# Altium PCB ControlBoard.PcbDoc
Units mil, origin at the board's own origin, x right, y up, seen from the top; angles counter-clockwise.
Board outline 1195.03 x 1520.03 mil, 4 copper layers (Top Layer, POWER, GND, Bottom Layer), stack 23.756 mil thick; 25 components, 17 nets, 58 pads, 17 vias.
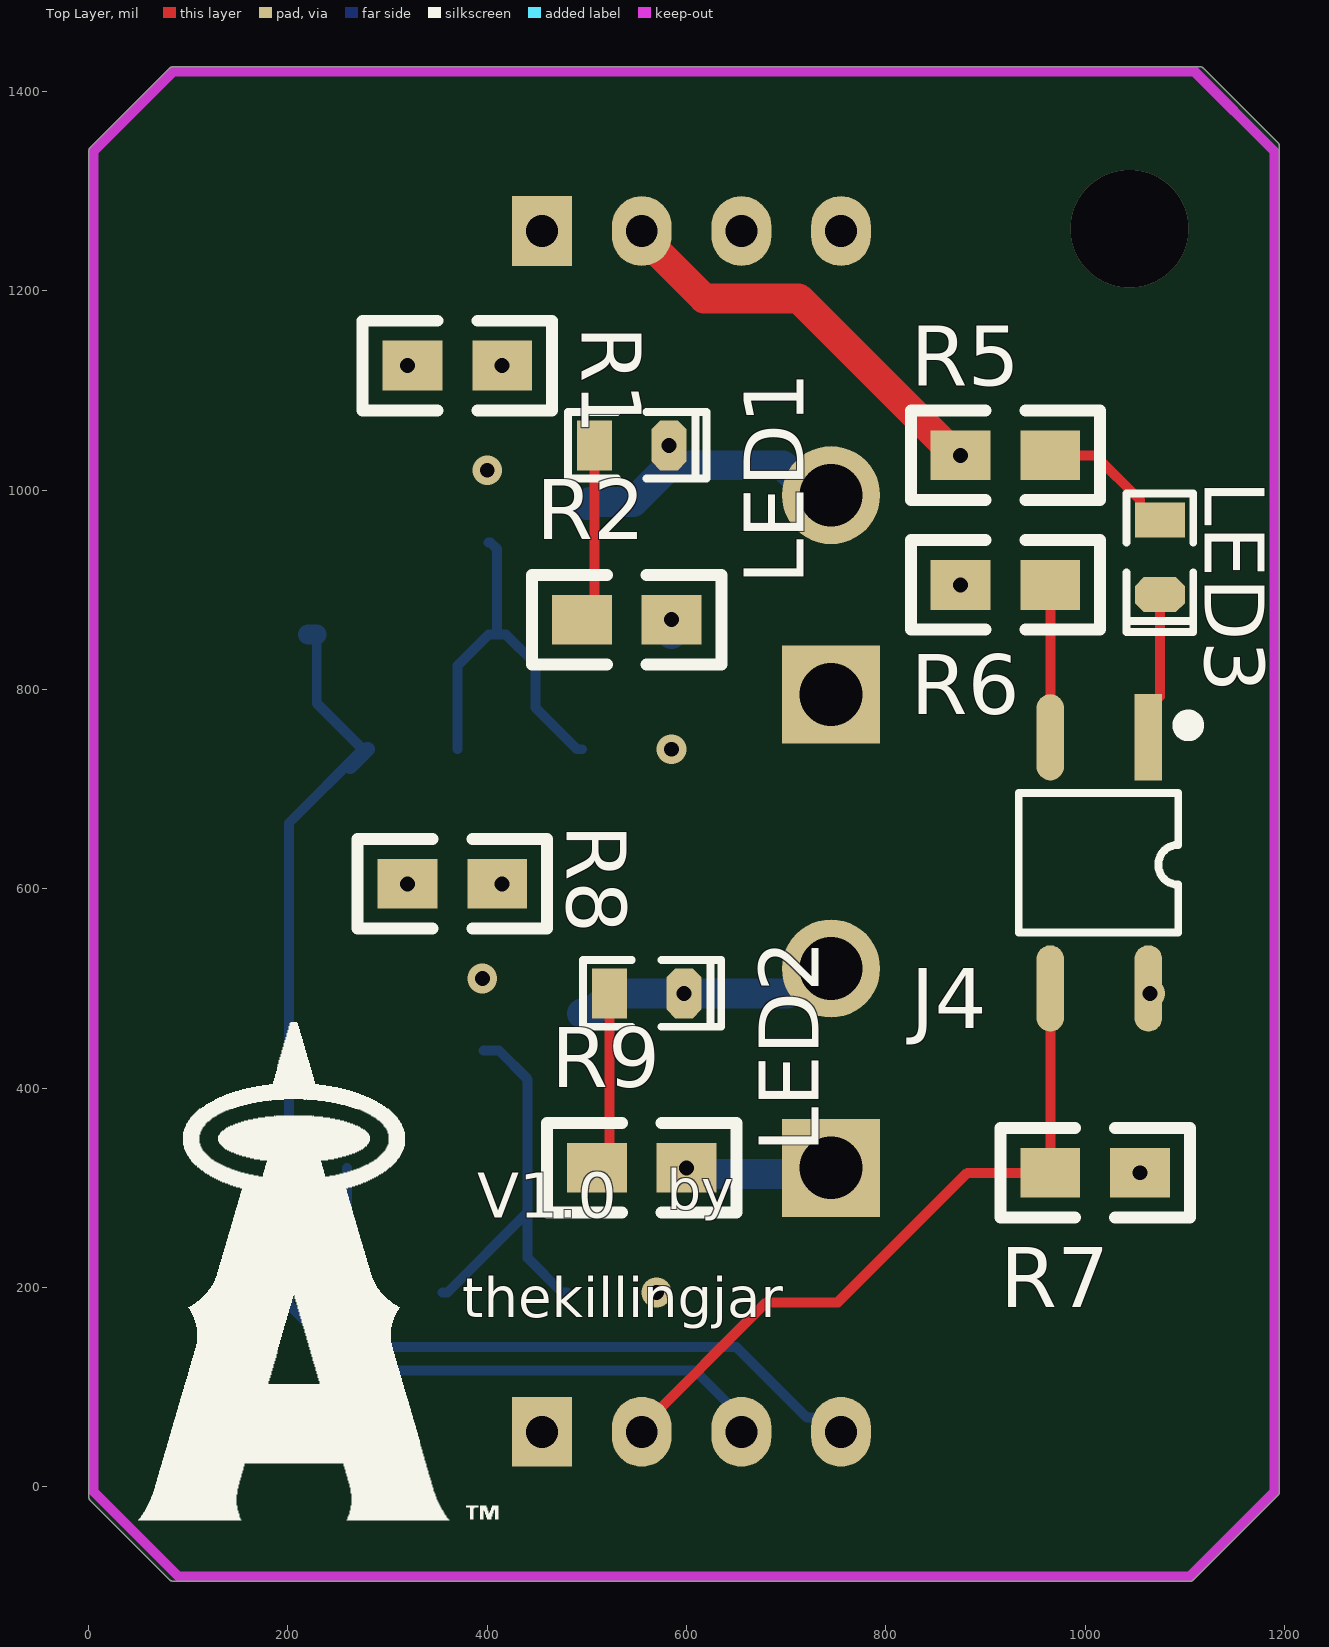
[diagram p0: Top Layer view]
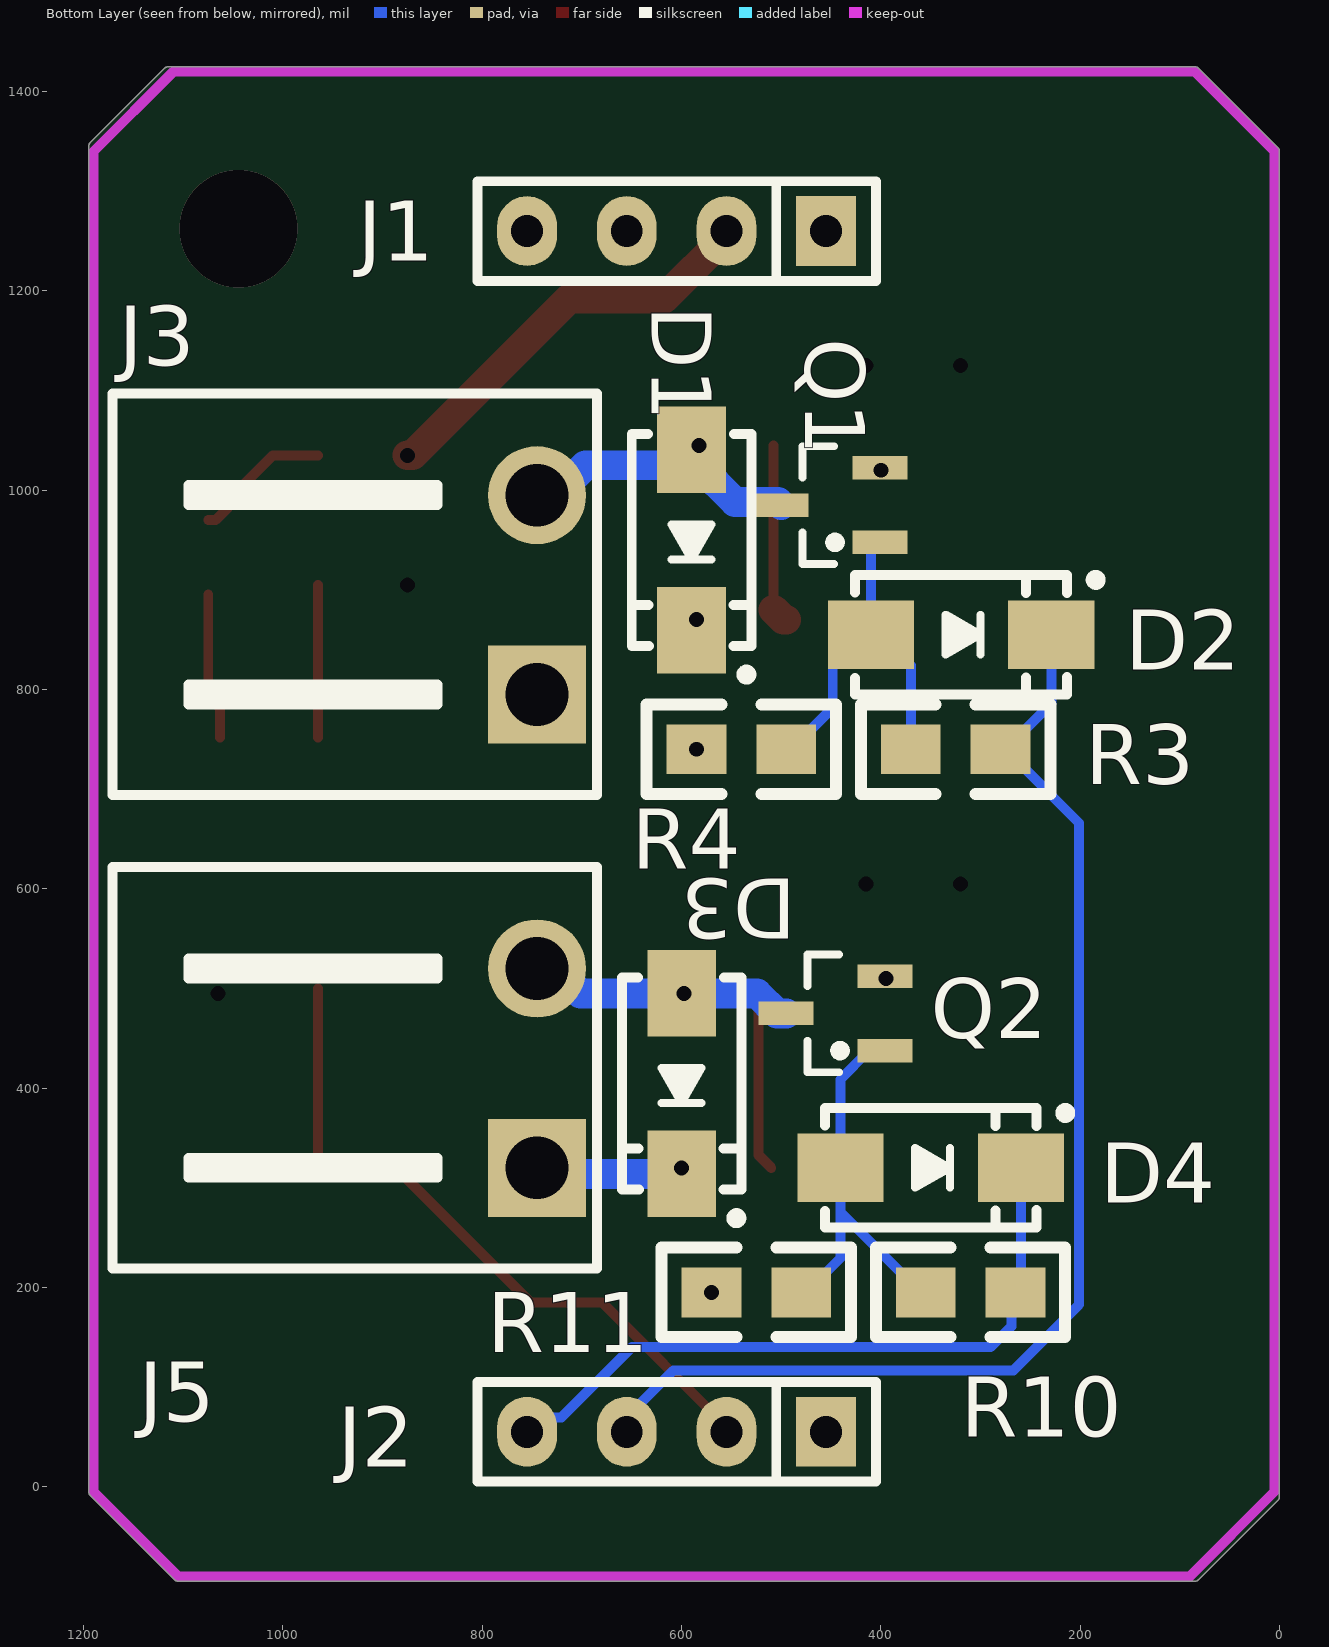
[diagram p1: Bottom Layer view, seen from below]
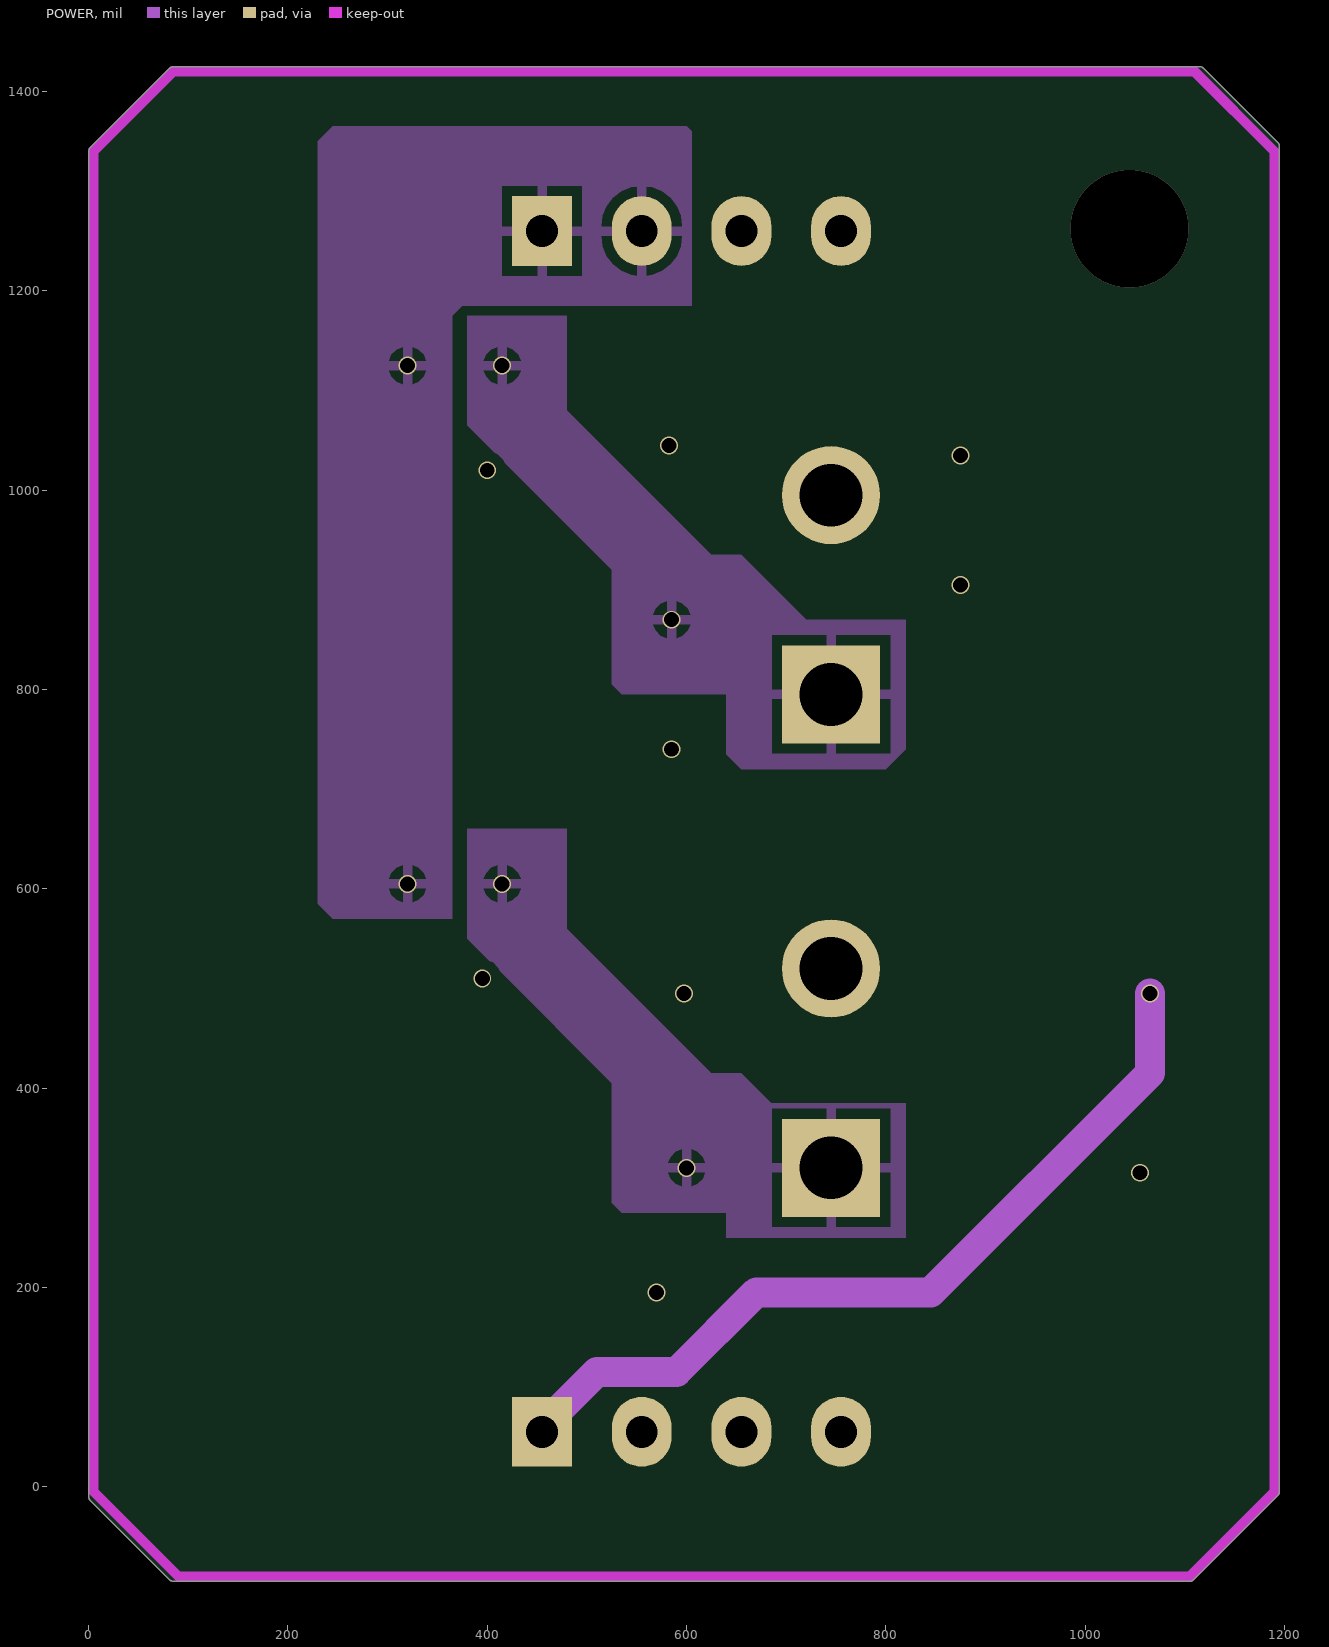
[diagram p2: POWER]
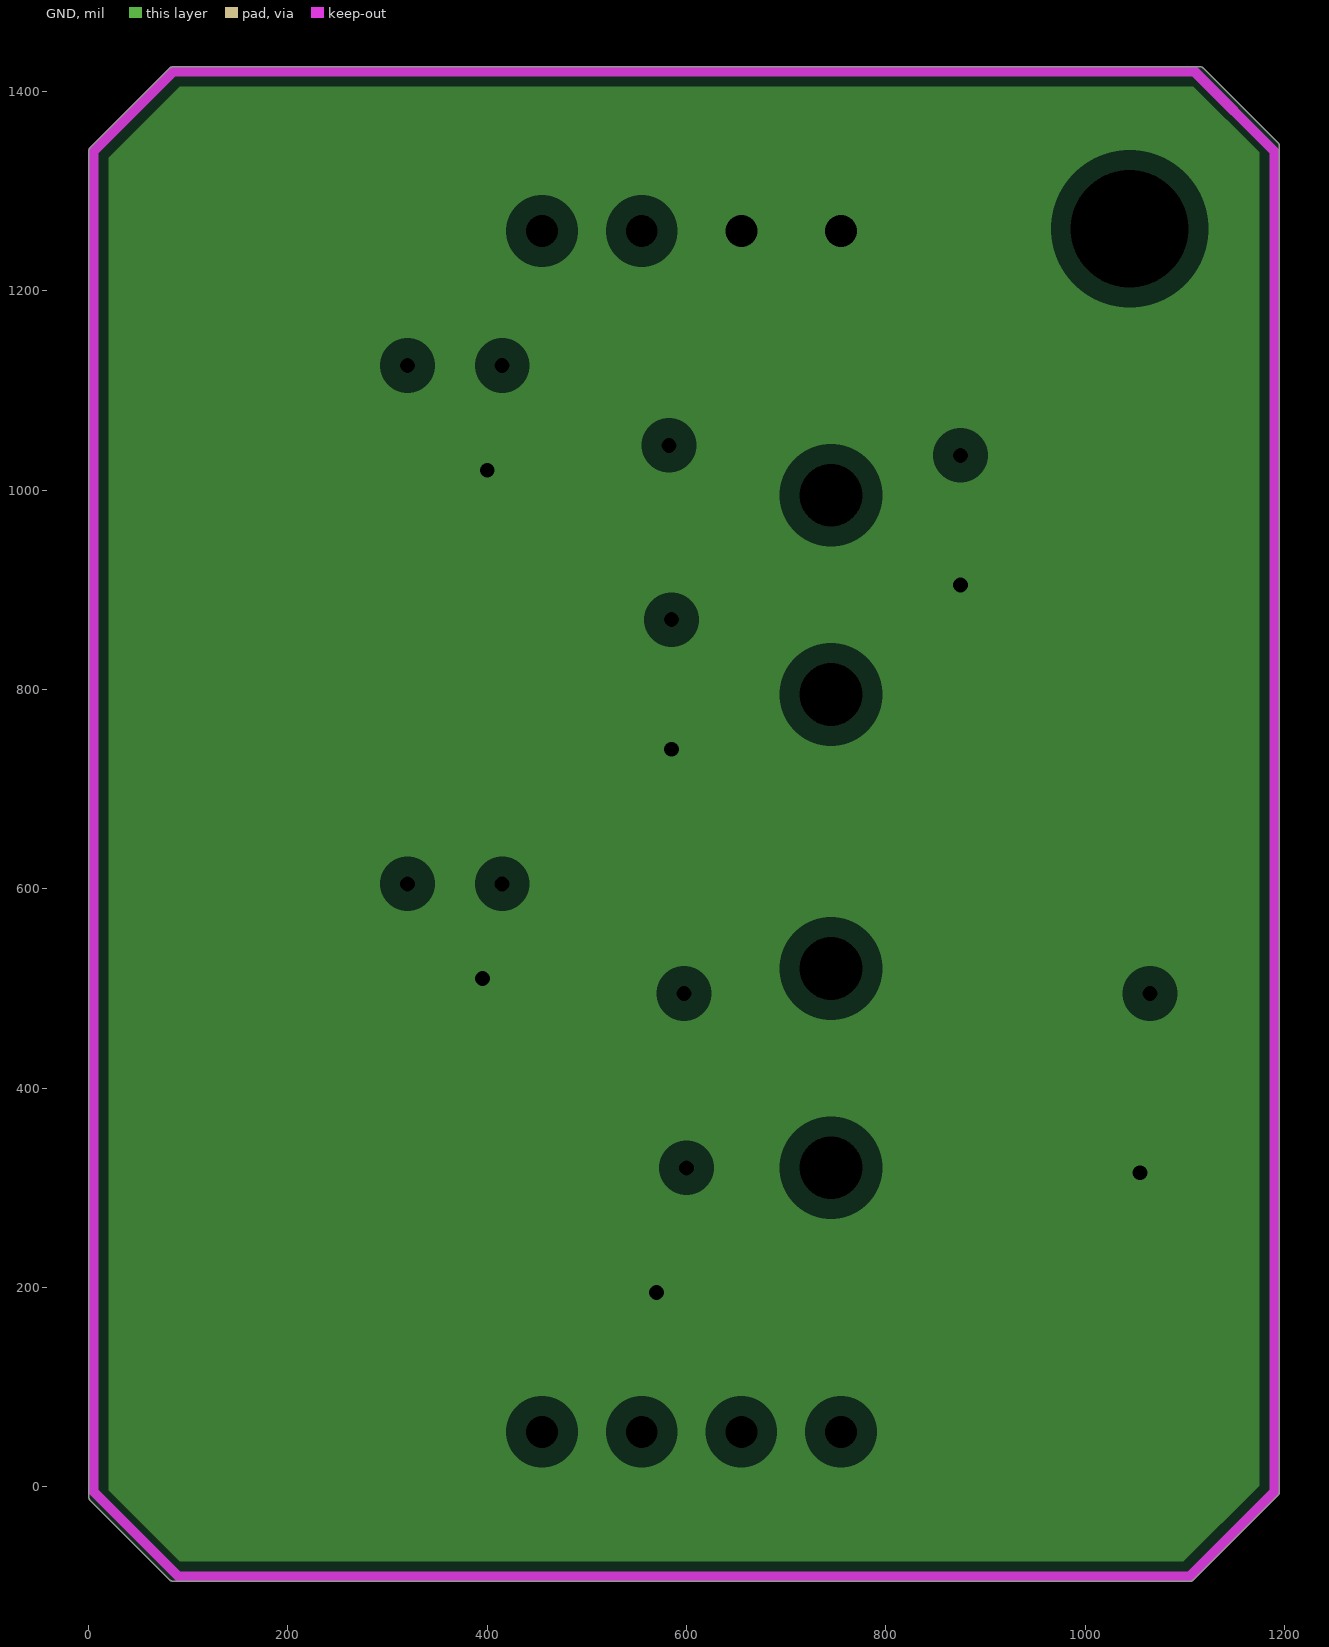
[diagram p3: GND, clearances drawn from the general rule]

## Layer stack, top to bottom
Top Solder: solder mask 0.4, Solder Resist, Dk 3.5
Top Layer: signal copper 1.4
Dielectric 2: prepreg 2.8, PP-006, Dk 4.1
POWER: signal copper 1.378
Dielectric 1: dielectric 12.6, FR-4, Dk 4.8
GND: plane copper 1.378, net GND
Dielectric 3: prepreg 2.8, PP-006, Dk 4.1
Bottom Layer: signal copper 1.4
Bottom Solder: solder mask 0.4, Solder Resist, Dk 3.5

## Board outline
1.47,-13.56 cw(c5,-10) -0.01,-10 -0.01,1340 cw(c5,1340) 1.47,1343.56 1.45,1343.55 81.45,1423.55 81.44,1423.53 cw(c85,1420) 85,1425.01 1115,1425.01 cw(c1115,1420) 1118.56,1423.53 1118.55,1423.55 1193.55,1348.55 1193.53,1348.56 cw(c1190,1345) 1195.01,1345 1195.01,-5 cw(c1190,-5) 1193.53,-8.56 1193.55,-8.55 1108.55,-93.55 1108.56,-93.53 cw(c1105,-90) 1105,-95.01 85,-95.01 cw(c85,-90) 81.44,-93.53 81.45,-93.55

## Design rules (kind name [scope] priority, off if disabled: settings)
Clearance [All] p1: gap=10 ignorepadtopadclearanceinfootprint=FALSE except(0: Arc-Hole Track-Hole SMDPad-Hole THPad-Hole Via-Hole Fill-Hole Poly-Hole Region-Hole Text-Hole)
HoleSize [All] p1: absolutevalues=TRUE maxlimit=120 minlimit=1 maxpercent=80.000 minpercent=20.000
PlaneClearance [All] p1: clearance=20
PlaneConnect [All] p1: planeconnectstyle=Relief reliefexpansion=20 reliefentries=4 reliefconductorwidth=10 reliefairgap=10
PolygonConnect GND_L01_P003 [All vs IsNamedPolygon('GND_L01_P003')] p1: connectstyle=Direct reliefconductorwidth=10 reliefentries=4 polygonreliefangle="90 Angle" airgapwidth=10
PolygonConnect VCC_24V_L01_P002 [All vs IsNamedPolygon('VCC_24V_L01_P002')] p2: connectstyle=Direct reliefconductorwidth=10 reliefentries=4 polygonreliefangle="90 Angle" airgapwidth=10
PolygonConnect 11 [All vs IsNamedPolygon('VCC_24V_L01_P002')] p3: connectstyle=Direct reliefconductorwidth=10 reliefentries=4 polygonreliefangle="90 Angle" airgapwidth=10
PolygonConnect PolygonConnect_4 [All vs IsNamedPolygon('VCC_24V_L01_P002')] p4: connectstyle=Direct reliefconductorwidth=10 reliefentries=4 polygonreliefangle="90 Angle" airgapwidth=10
PolygonConnect PolygonConnect_3 [All vs IsNamedPolygon('ACTUATOR_IN_L01_P000')] p5: connectstyle=Direct reliefconductorwidth=10 reliefentries=4 polygonreliefangle="90 Angle" airgapwidth=10
PolygonConnect 123 [All vs IsNamedPolygon('ACTUATOR_IN_L01_P000')] p6: connectstyle=Direct reliefconductorwidth=10 reliefentries=4 polygonreliefangle="90 Angle" airgapwidth=10
PolygonConnect PolygonConnect_2 [All vs IsNamedPolygon('ACTUATOR_IN_L01_P000')] p7: connectstyle=Direct reliefconductorwidth=10 reliefentries=4 polygonreliefangle="90 Angle" airgapwidth=10
PolygonConnect PolygonConnect_1 [All vs IsNamedPolygon('ACTUATOR_IN_L01_P000')] p8: connectstyle=Direct reliefconductorwidth=10 reliefentries=4 polygonreliefangle="90 Angle" airgapwidth=10
PolygonConnect [All] p9: connectstyle=Relief reliefconductorwidth=10 reliefentries=4 polygonreliefangle="90 Angle" airgapwidth=10
RoutingVias RoutingVias_1 [InNet('No Net')] p1: holewidth=28 width=50 viastyle="Through Hole" minholewidth=28 minwidth=50 maxholewidth=200 maxwidth=200
RoutingVias [All] p2: holewidth=8 width=18 viastyle="Through Hole" minholewidth=8 minwidth=18 maxholewidth=20 maxwidth=35
SilkToSilkClearance [All] p1 off: silktosilkclearance=10
SilkToSolderMaskClearance [IsPad] p1 off: minsilkscreentomaskgap=10 clearancetoexposedcopper=TRUE
SolderMaskExpansion [All] p1: expansion=4 istentingtop=FALSE
Width [All] p1: maxlimit=30 minlimit=10 preferedwidth=10 minimp=50.000000 maximp=50.000000 favimp=50.000000
25 further rules are at their usual default settings.

## Components (designator, comment, footprint, x,y, rotation, side; value= is the part's Value field where it differs from the comment)
D1 "SS14" SMA 590,950 r270 bottom
D2 "SS14" SMA 319.45,855 r180 bottom
D3 "SS14" SMA 600,404.45 r270 bottom
D4 "SS14" SMA 350,320 r180 bottom
J1 "Pin HDR1X4" "PIN HDR1X4/2.54MM-S" 455,1260 r270 bottom
J2 "Pin HDR1X4" "PIN HDR1X4/2.54MM-S" 455,55 r270 bottom
J3 "KF2EDGK-2P" KF2EDGK5.08W-2P 745,795 r90 bottom
J4 "TLP181" SOP4 1014.21,625.98 r270 top
J5 "KF2EDGK-2P" KF2EDGK5.08W-2P 745,320 r90 bottom
LED1 "蓝色" "LED 0805B" 545,1045 r0 top
LED2 "蓝色" "LED 0805B" 560,495 r0 top
LED3 "白色" "LED 0805W" 1075,932.6 r270 top
Q1 "AO3400" SOT23 401.03,947.59 r90 bottom
Q2 "AO3400" SOT23 396.03,437.59 r90 bottom
R1 "30R" 0805R 325,1125 r0 top
R2 "1K" 0805R 585,870 r180 top
R3 "30R" 0805R 370,740 r180 bottom
R4 "10K" 0805R 495,740 r0 bottom
R5 "2K2" 0805R 965,1035 r180 top
R6 "100R" 0805R 965,905 r180 top
R7 "1K" 0805R 965,315 r0 top
R8 "30R" 0805R 320,605 r0 top
R9 "1K" 0805R 600,320 r180 top
R10 "30R" 0805R 355,195 r180 bottom
R11 "10K" 0805R 480,195 r0 bottom

## Footprints (in the part's own frame and the unit in brackets; to place one, negate y for a bottom-side part, rotate by r counter-clockwise, add the part's x,y. Pads: shape width x height; smd on the part's side, far side on the other; paste and mask are expansions set on the pad)
0805R [mil]
  rect 60x50 smd: 1(0,0) 2(90,0)
  silkscreen extent -50,-45 140,45, body extent 1,-25 80,25, height 15
KF2EDGK5.08W-2P [mm]
  rect 2.5x2.5 hole 1.6: 1(0,0)
  round 2.5 hole 1.6: 2(5.08,0)
  silkscreen extent -2.57,-1.52 7.67,10.82, body extent -2.54,-0.57 7.62,10.73, height 8.5
"LED 0805B" [mil] "蓝色0805LED"
  rect 35x50 smd: 1(-37.4,-0.01)
  oct 35x50 smd: 2(37.4,-0.01)
  silkscreen extent -64,-33 75,33, body extent -39,-25 39,25, height 32
"LED 0805W" [mil] "白色0805LED"
  rect 35x50 smd: 1(-37.4,0)
  oct 35x50 smd: 2(37.4,0)
  silkscreen extent -64,-33 75,33, body extent -39,-25 39,25, height 32
"PIN HDR1X4/2.54MM-S" [mil]
  rect 70x60 hole 32: 1(0,0)
  oval 70x60 hole 32: 2(0,-100) 3(0,-200) 4(0,-300)
  silkscreen extent -50,-350 50,50, body extent -50,-350 50,50, height 336
SMA [mm] "4.5x2.6*2.2mm（长宽高，不包括引脚）"
  rect 2.2x1.75 smd: 1(-2.3,0) 2(2.3,0)
  silkscreen extent -2.7,-1.52 3.56,1.52, body extent -2.52,-1.3 2.57,1.3, height 2.15
SOP4 [mm] "4.4*6.8*2.1mm（长宽高）"
  rect 2.2x0.7 smd: 1(-3.2,1.25)
  oval 2.2x0.7 smd: 2(-3.2,-1.25) 3(3.2,-1.25) 4(3.2,1.25)
  silkscreen extent -3.66,-2.05 1.78,2.42, body extent -3.4,-2.15 3.4,2.15, height 1.9
SOT23 [mm]
  rect 0.6x1.4 smd: D(0.95,2.514) G(0,0) S(1.9,0)
  silkscreen extent -0.55,1.02 2.45,1.97, body extent -0.56,0.22 2.44,2.62, height 1.05

## Part data
D1 D2 D3 D4: "肖特基二极管", BOM名称=肖特基二极管, 学习资源=www.ooocke.com, 属性=40V/1A, 版权归属=源创客
J4: "光耦", BOM名称=光耦, 学习资源=www.ooocke.com, 版权归属=源创客
LED1 LED2 LED3: library part LED-SMD, "贴片LED", BOM名称=贴片LED, 学习资源=www.ooocke.com, 版权归属=源创客
Q1 Q2: library part N-MOS, "N沟道场效应管"
R1 R2 R3 R4 R5 R6 R7 R8 R9 R10 R11: library part RES, "贴片电阻"

## Via types
v1: diameter 30/18/0 (per signal layer), hole 15, Top Layer to Bottom Layer, 16 vias
v2: diameter 118.11, hole 118.11, Top Layer to Bottom Layer, 1 vias

## Nets (pads, with @x,y where several pads share a name; then routed paths per layer and width w, separated by ;. In a path a pad name is that pad's centre, name@x,y a point inside that pad or via, vN(x,y) a via of type N, cw(c..) or ccw(c..) an arc to the next point about the centre after c; other vN are vias at no path point)
brake_control1_5V: D2.2 J2.3 R3.2 | length 1276.2
  Bottom Layer w10: D2.2 228.9,786.1 R3.2@275,740 ; R3.2 R3.2@275,740 ; J2.3 655,70 608.32,116.68 267.11,116.68 201.14,182.65 201.14,666.14 R3.2@275,740
  Bottom Layer w15: R3.2@262.5,722.5 R3.2
  Bottom Layer w20: D2.2@220.04,855 D2.2
brake_control2_5V: D4.2 J2.4 R10.2 | length 680
  Bottom Layer w10: R10.2@259.45,205.55 D4.2 ; R10.2 269.14,190.86 269.14,160.86 290,140 650,140 720.68,69.32 740.68,69.32 J2.4
GND: J1.3 J1.4 Q1.S Q2.S R4.2 R6.2 R7.2 R11.2
  other v1: 570,195 1055,315 395,510 585,740 875,905 400,1020
NetD1_1: D1.1 J3.2 LED1.2 Q1.D | length 277
  Bottom Layer w30: Q1.D 503.19,988.19 546.5,988.19 582.4,1024.09 v1(582.4,1044.99) ; D1.1@599.96,1025 696.48,1025 726.48,995 J3.2
NetD1_2: D1.2 J3.1 R1.2 R2.1 | length 14.4
  Bottom Layer w30: D1.2@585,855.59 v1(585,870)
  other v1: 415,1125
NetD2_1: D2.1 Q1.G R3.1 R4.1 | length 392.7
  Bottom Layer w10: R3.1 370,823.86 401.14,855 D2.1 ; Q1.G 403.19,947.59 410,940.78 D2.1 ; R4.1 490,740 448.31,781.69 448.31,825.55 418.86,855 D2.1
NetD3_1: D3.1 J5.2 LED2.2 Q2.D | length 268.6
  Bottom Layer w30: Q2.D 504.37,475 524.36,494.99 v1(597.4,494.99) 701.48,494.99 726.48,520 J5.2
NetD3_2: D3.2 J5.1 R8.2 R9.1 | length 150.1
  Bottom Layer w30: v1(600,320) 606.1,313.9 738.9,313.9 J5.1
  other v1: 415,605
NetD4_1: D4.1 Q2.G R10.1 R11.1 | length 408.4
  Bottom Layer w10: R10.1 360,195 440.55,275.55 ; Q2.G 411.78,437.59 440.55,408.82 D4.1 440.55,275.55 ; R11.1 475,195 440.55,229.45 440.55,275.55
NetJ4_1: J4.1 LED3.2 | length 148
  Top Layer w10: J4.1 1063.43,781.5 1075,793.07 LED3.2
NetJ4_2: J4.2 R6.1 | length 153
  Top Layer w10: J4.2 R6.1
NetLED1_1: LED1.1 R2.2 | length 181.7
  Top Layer w10: R2.2@507.6,880 LED1.1
  Top Layer w30: R2.2 497.6,870 R2.2@507.6,880
NetLED2_1: LED2.1 R9.2 | length 180.2
  Top Layer w10: R9.2 522.6,332.6 LED2.1
NetLED3_1: LED3.1 R5.1 | length 141.3
  Top Layer w10: R5.1 1010,1035 1055,990 1055,982.5 1067.5,970 LED3.1
shutdown_circuit_5V: J2.2 J4.3 R7.1 | length 710.6
  Top Layer w10: J2.2@555,50 J2.2 555,60 680,185 751.76,185 881.76,315 R7.1 J4.3
VCC_5V: J2.1 J4.4 | length 842
  POWER w30: J2.1 455,60 510,115 590,115 670,195 845,195 1065,415 v1(1065,495)
VCC_24V: J1.1 J1.2 R1.1 R5.2 R8.1 | length 416.1
  Top Layer w30: J1.2 555,1255 617.5,1192.5 712.5,1192.5 870,1035 v1(875,1035)
  other v1: 320,605 320,1125
copper on no net:
  other v2: 1044.56,1262.45

## Polygon pours and split planes (outlines as drawn)
NetD3_2 on POWER "NETD3_2_L02_P004" (solid, pour order 4): 380,660 480,660 480,560 625,415 655,415 685,385 820,385 820,250 640,250 640,275 535,275 525,285 525,405 380,550
NetD1_2 on POWER "NETD1_2_L02_P003" (solid, pour order 3): 380,1180 480,1180 480,1080 625,935 655,935 720,870 820,870 820,740 800,720 655,720 640,735 640,795 535,795 525,805 525,920 380,1065
VCC_24V on POWER "VCC_24V_L02_P001" (solid, pour order 1): 395,1365 400,1365 600,1365 605,1360 605,1185 375,1185 365,1175 365,570 245,570 230,585 230,1350 245,1365 405,1365
GND on GND (split plane): 1174.92,1338.75 1174.92,1.25 1098.75,-74.92 91.25,-74.92 20.08,-3.75 20.08,1333.75 91.25,1404.92 1108.75,1404.92

## Keep-outs
Keep-Out Layer:
  lines w10: 85,1420 5,1340 5,-5 90,-90 1105,-90 1190,-5 1190,1340 1110.04,1419.96 85.04,1419.96

## Silkscreen, mask and mechanical layers (free items; w line width, h text height)
Top Overlay:
  drawing of 844 lines, arcs and shapes, not listed
  text "by" at 580,278.33 h40
  text "V1.0" at 390,270 h45
  text "thekillingjar" at 375,170 h40
Mechanical 1:
  lines w10: 5,-10 85,-90 1105,-90 1190,-5 1190,1345 1115,1420 85,1420 5,1340 5,-10